# Altium PCB Nueron.PcbDoc
Units mil, origin at the board's own origin, x right, y up, seen from the top; angles counter-clockwise.
Board outline 1000 x 995 mil, 2 copper layers (Top Layer, Bottom Layer); 12 components, 4 nets, 29 pads, 0 vias.
Unrouted connection lines stored in the file: 7.
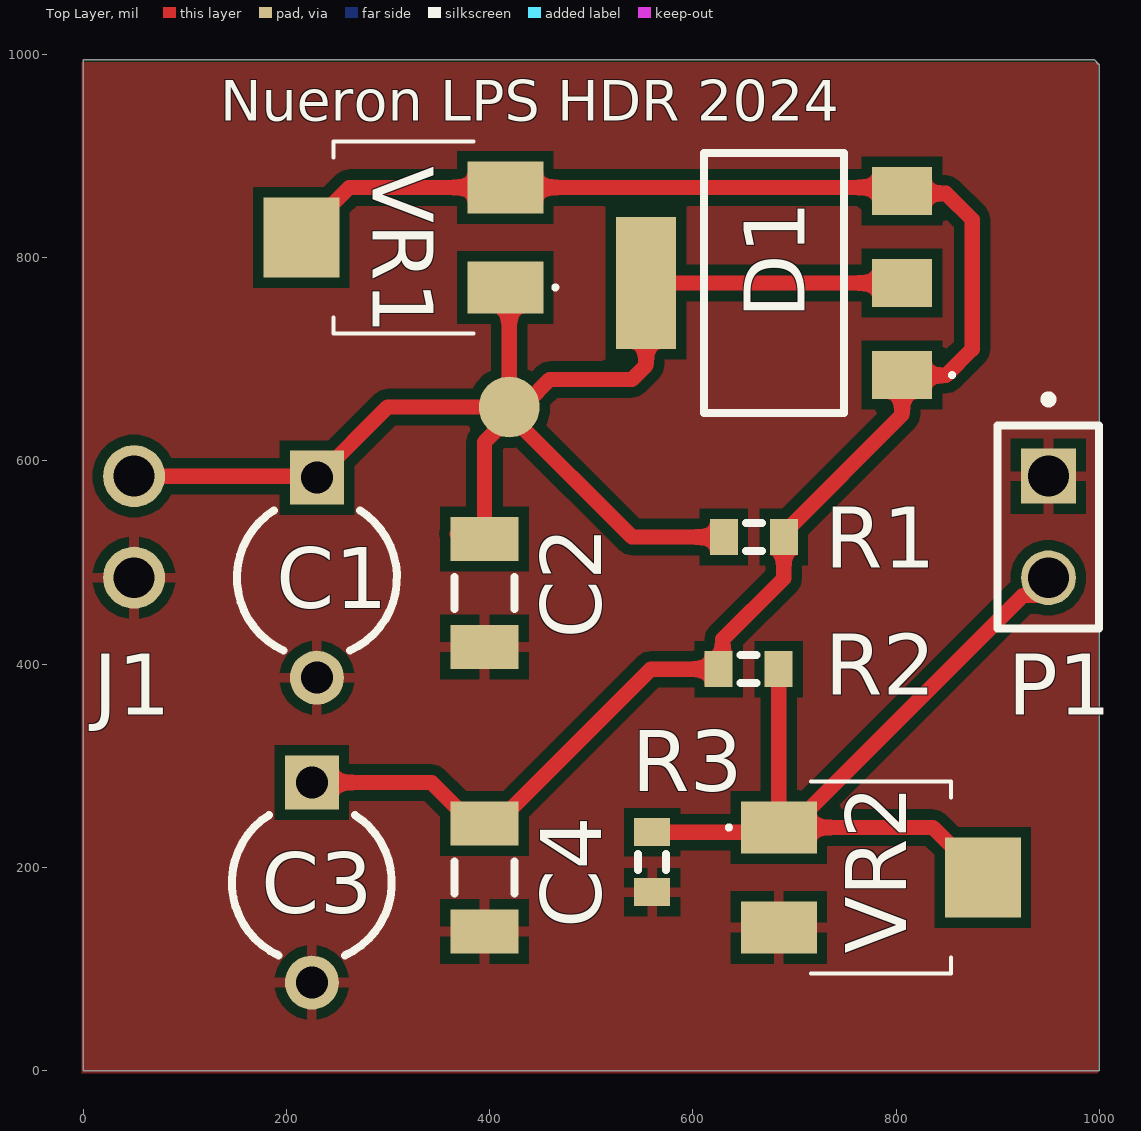
[diagram p0: Top Layer view]
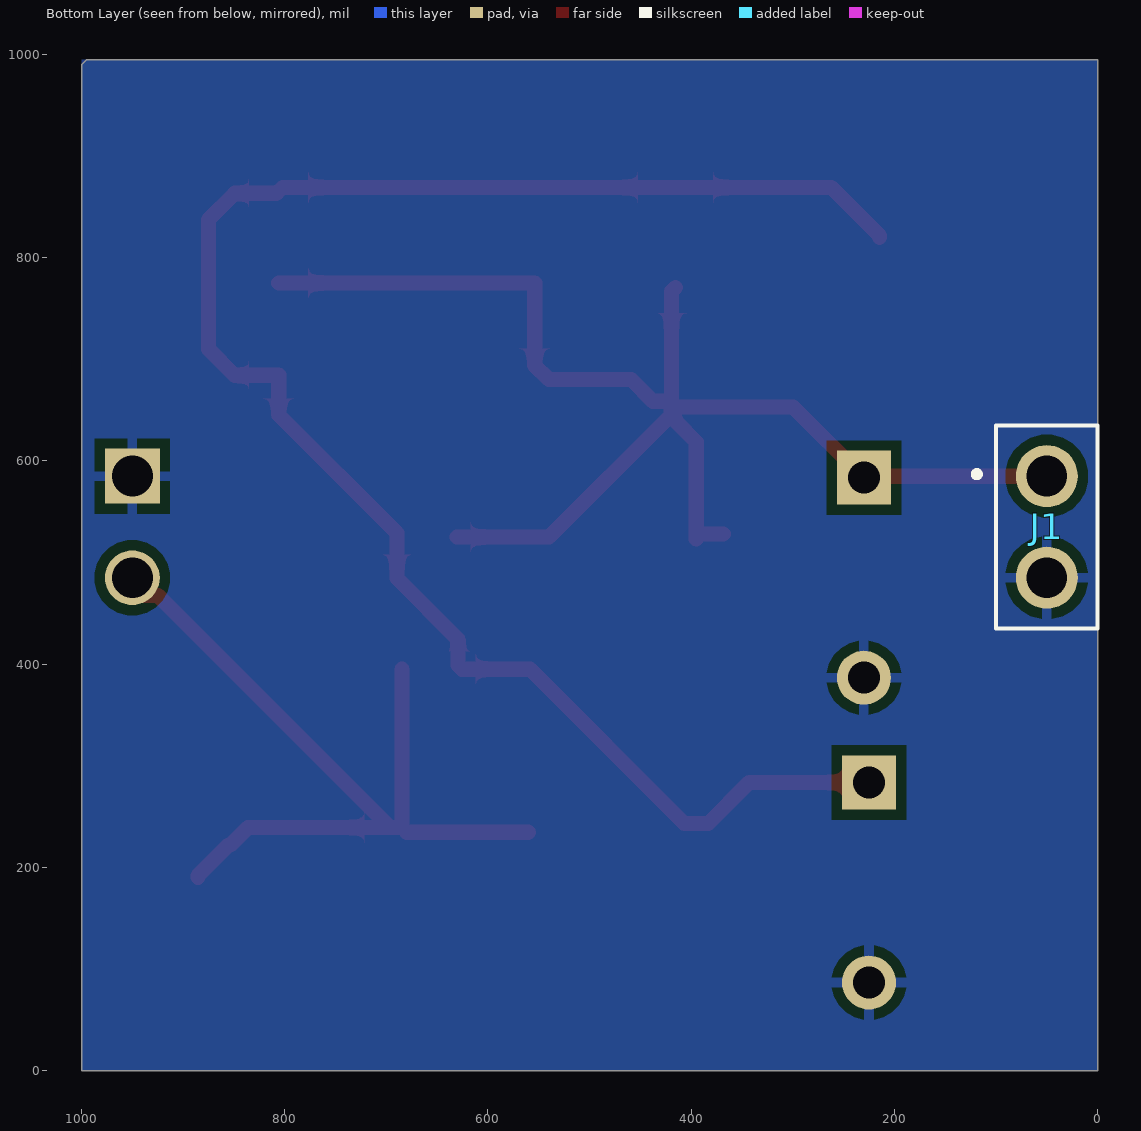
[diagram p1: Bottom Layer view, seen from below]

## Layer stack, top to bottom
Top Solder: solder mask 0.4, Solder Resist, Dk 3.5
Top Layer: signal copper 1.4
Dielectric 1: dielectric 12.6, FR-4, Dk 4.8
Bottom Layer: signal copper 1.4
Bottom Solder: solder mask 0.4, Solder Resist, Dk 3.5

## Board outline
0,0 1000,0 1000,990 995,995 0,995

## Design rules (kind name [scope] priority, off if disabled: settings)
Clearance [All] p1: gap=10 ignorepadtopadclearanceinfootprint=FALSE except(0: Arc-Hole Track-Hole SMDPad-Hole THPad-Hole Via-Hole Fill-Hole Poly-Hole Region-Hole Text-Hole)
PolygonConnect [All] p1: connectstyle=Relief reliefconductorwidth=10 reliefentries=4 polygonreliefangle="90 Angle" airgapwidth=10
RoutingVias [All] p1: holewidth=28 width=50 viastyle="Through Hole" minholewidth=28 minwidth=50 maxholewidth=28 maxwidth=50
SolderMaskExpansion [All] p1: expansion=4 istentingtop=FALSE
Width [All] p1: maxlimit=20 minlimit=10 preferedwidth=15
30 further rules are at their usual default settings.

## Classes and differential pairs
component class Nueron: C2 C4 D1 J1 P1 R1 R2 R3 VR1 VR2

## Components (designator, comment, footprint, x,y, rotation, side; value= is the part's Value field where it differs from the comment)
C1 "Cap2" CAPR5-4X5 230,485 r270 top value=100pF
C2 "Cap Semi" C1206 395,470 r90 top value=100pF
C3 "Cap2" CAPR5-4X5 225,185 r270 top value=100pF
C4 "Cap Semi" C1206 395,190 r90 top value=100pF
D1 "S4X8TS1RP" S4X8TS1RP 680,775 r90 top
J1 "SSW-102-01-X-S" TSW-102-XX-YY-S 50,585 r270 bottom
P1 "TSW-102-07-G-S" SAMTEC_TSW-102-07-G-S 950,535 r270 top
R1 "Res3" J1-0603 660,525 r0 top value=1K
R2 "Res3" J1-0603 655,395 r0 top value=1K
R3 "Res3" J1-0603 560,205 r90 top value=1K
VR1 "3214X-1-103E" 3214X1203E 315,820 r180 top
VR2 "3214X-1-103E" 3214X1203E 785,190 r0 top

## Footprints (in the part's own frame and the unit in brackets; to place one, negate y for a bottom-side part, rotate by r counter-clockwise, add the part's x,y. Pads: shape width x height; smd on the part's side, far side on the other; paste and mask are expansions set on the pad)
3214X1203E [mm]
  rect 1.9x1.3 smd: 1(-2.55,1.25) 3(-2.55,-1.25)
  rect 1.9x2 smd: 2(2.55,0)
  silkscreen extent -3.85,-2.4 1.75,2.4, body extent -3.01,-2.43 2.67,2.4, height 5.32
C1206 [mm] "Chip Capacitor, Body 3.2x1.6mm, IPC High Density"
  rect 1.1x1.7 smd: 1(-1.35,0) 2(1.35,0)
  silkscreen extent -0.4,-0.75 0.4,0.75, body extent -1.7,-0.9 1.7,0.9, height 1.3
CAPR5-4X5 [mm] "Capacitor; 2 Leads"
  rect 1.35x1.35 hole 0.8: 1(-2.5,0)
  round 1.35 hole 0.8: 2(2.5,0)
  silkscreen extent -1.69,-2 1.82,2
J1-0603 [mm] "Chip Resistor, Body 1.6x0.8mm, IPC High Density"
  rect 0.7x0.9 smd: 1(-0.75,0) 2(0.75,0)
  silkscreen extent -0.2,-0.35 0.2,0.35, body extent -0.85,-0.48 0.85,0.48, height 0.9
S4X8TS1RP [mm]
  rect 1.2x1.5 smd: 1(-2.3,-3.2) 2(0,-3.2) 3(2.3,-3.2)
  rect 3.3x1.5 smd: 4(0,3.2)
  silkscreen extent -3.25,-4.5 3.25,1.75
SAMTEC_TSW-102-07-G-S [mm]
  rect 1.37x1.37 / inner round 1.37 / far side rect 1.37x1.37 hole 1.02: 01(-1.27,0)
  round 1.37 hole 1.02: 02(1.27,0)
  silkscreen extent -3.29,-1.27 2.54,1.27
TSW-102-XX-YY-S [mm]
  round 1.55 hole 1.02: 1(0,0) 2(2.54,0)
  silkscreen extent -1.27,-1.8 3.81,1.27, body extent -1.39,-1.28 3.82,1.26, height 9.16

## Part data
C1 C3: "Capacitor", PackageDescription="Capacitor; 2 Leads", PackageReference=CAPR5-4X5, Published=23-Sep-2002, Publisher="Altium Limited"
C2 C4: "Capacitor (Semiconductor SIM Model)", LatestRevisionDate=29-May-2009, LatestRevisionNote="IPC-7351 Footprint Added.", PackageDescription="Chip Capacitor", PackageReference=C1206, Published=8-Jun-2000, Publisher="Altium Limited"
D1: "Thyristor", Manufacturer_Name=LITTELFUSE, Mouser Part Number=576-S4X8TS1RP, Datasheet Link=https://www.littelfuse.com/media?resourcetype=datasheets&itemid=33d0d5e7-46fd-406d-80ae-f94899e78783&filename=littelfuse-thyristor-sxx8xsx-datasheet, Height=1.93mm, Manufacturer_Part_Number=S4X8TS1RP, Mouser Price/Stock=https://www.mouser.com/Search/Refine.aspx?Keyword=576-S4X8TS1RP
J1: "2 Position Receptacle Connector Through Hole", Package=None, Availability=Good, Check_prices=https://www.snapeda.com/parts/SSW-102-01-G-S/Samtec/view-part/4872079/?ref=eda, MF=Samtec, MP=SSW-102-01-G-S, Price=None, Purchase-URL=https://pricing.snapeda.com/search/part/SSW-102-01-G-S/?ref=eda, SnapEDA_Link=https://www.snapeda.com/parts/SSW-102-01-G-S/Samtec/view-part/4872079/?ref=snap
P1: "<a href=\"https://pricing.snapeda.com/parts/TSW-102-07-G-S/Samtec/view-part?ref=eda\">Check availability</a>", Package=None, Availability=Unavailable, MF="Samtec Inc.", MP=TSW-102-07-G-S, Price=None
R1 R2 R3: "Resistor", LatestRevisionDate=29-May-2009, LatestRevisionNote="IPC-7351 Footprint Added.", PackageDescription="Chip Resistor", PackageReference=J1-0603, Published=8-Jun-2000, Publisher="Altium Limited"
VR1 VR2: "10 kOhms 0.25W, 1/4W Gull Wing Surface Mount Trimmer Potentiometer Cermet 5 Turn Top Adjustment", Package="6432 Bourns", Availability=Good, Check_prices=https://www.snapeda.com/parts/3214X-1-103E/Bourns/view-part/287161/?ref=eda, MF=Bourns, MP=3214X-1-103E, Price=None, Purchase-URL=https://pricing.snapeda.com/search/part/3214X-1-103E/?ref=eda, SnapEDA_Link=https://www.snapeda.com/parts/3214X-1-103E/Bourns/view-part/287161/?ref=snap

## Free pads (board coordinates)
  round 60 smd: 2(419.31,653.05)

## Nets (pads, with @x,y where several pads share a name; then routed paths per layer and width w, separated by ;. In a path a pad name is that pad's centre, name@x,y a point inside that pad or via, vN(x,y) a via of type N, cw(c..) or ccw(c..) an arc to the next point about the centre after c; other vN are vias at no path point)
+5: C1.1 C2.2 D1.2 D1.4 J1.1 pad.2 R1.1 VR1.1 | length 1428.3
  Top Layer w15: J1.1 228.43,585 C1.1 299.62,653.05 417.14,653.05 pad.2 ; C2.2@368.19,528.15 C2.2@386.24,528.15 ; C2.2 395,618.71 415,638.71 417.14,645.84 pad.2 ; VR1.1 419.31,766.87 pad.2 ; R1.1 540,525 420.03,644.97 pad.2 ; D1.2 D1.4 554.02,694.02 540,680 459.02,680 437.63,658.61 423.61,658.61 pad.2
GND: C1.2 C2.1 C3.2 C4.1 J1.2 P1.01 R3.1 VR2.3
NetC3_1: C3.1 C4.2 D1.1 D1.3 R1.2 R2.1 VR1.2 VR1.3 | length 1741.5
  Top Layer w15: VR1.2 214.61,821.97 261.85,869.21 VR1.3 D1.3@802.32,869.21 ; C3.1 342.91,283.43 383.19,243.15 C4.2 406.81,243.15 558.66,395 R2.1 629.39,398.92 629.39,424.39 689.53,484.53 689.53,528.94 805.98,645.39 D1.1 806.21,684.22 849.22,684.22 875,710 875,837.59 849.22,863.36 808.17,863.36 D1.3
NetP1_02: P1.02 R2.2 R3.2 VR2.1 VR2.2 | length 855.9
  Top Layer w15: R3.2 679.92,234.53 VR2.1 ; R2.2 684.53,239.29 VR2.1 ; VR2.2 885.39,191.97 855.49,221.87 853.52,221.87 836.18,239.21 VR2.1@696.42,239.21 ; P1.02@950,475 942.55,467.55 924.75,467.55 VR2.1@696.42,239.21 ; VR2.1 VR2.1@696.42,239.21

## Polygon pours and split planes (outlines as drawn)
GND on Bottom Layer "NONET_L02_P-001" (solid, pour order 0): 0,995 1000,995 1000,0 0,0
GND on Top Layer "NONET_L02_P-001" (solid, pour order 1): -1.63,992.23 998.37,992.23 998.37,-2.77 -1.63,-2.77

## Silkscreen, mask and mechanical layers (free items; w line width, h text height)
Top Overlay:
  text "Nueron LPS HDR 2024" at 135,935 h40
Mechanical 1:
  the board outline again, w10